# Altium PCB PCB1.PcbDoc
Units mil, origin at the board's own origin, x right, y up, seen from the top; angles counter-clockwise.
Board outline 3740 x 3020 mil, 4 copper layers (Top Layer, Mid Layer 1, Mid Layer 2, Bottom Layer), stack 61.811 mil thick; 65 components, 48 nets, 342 pads, 81 vias.
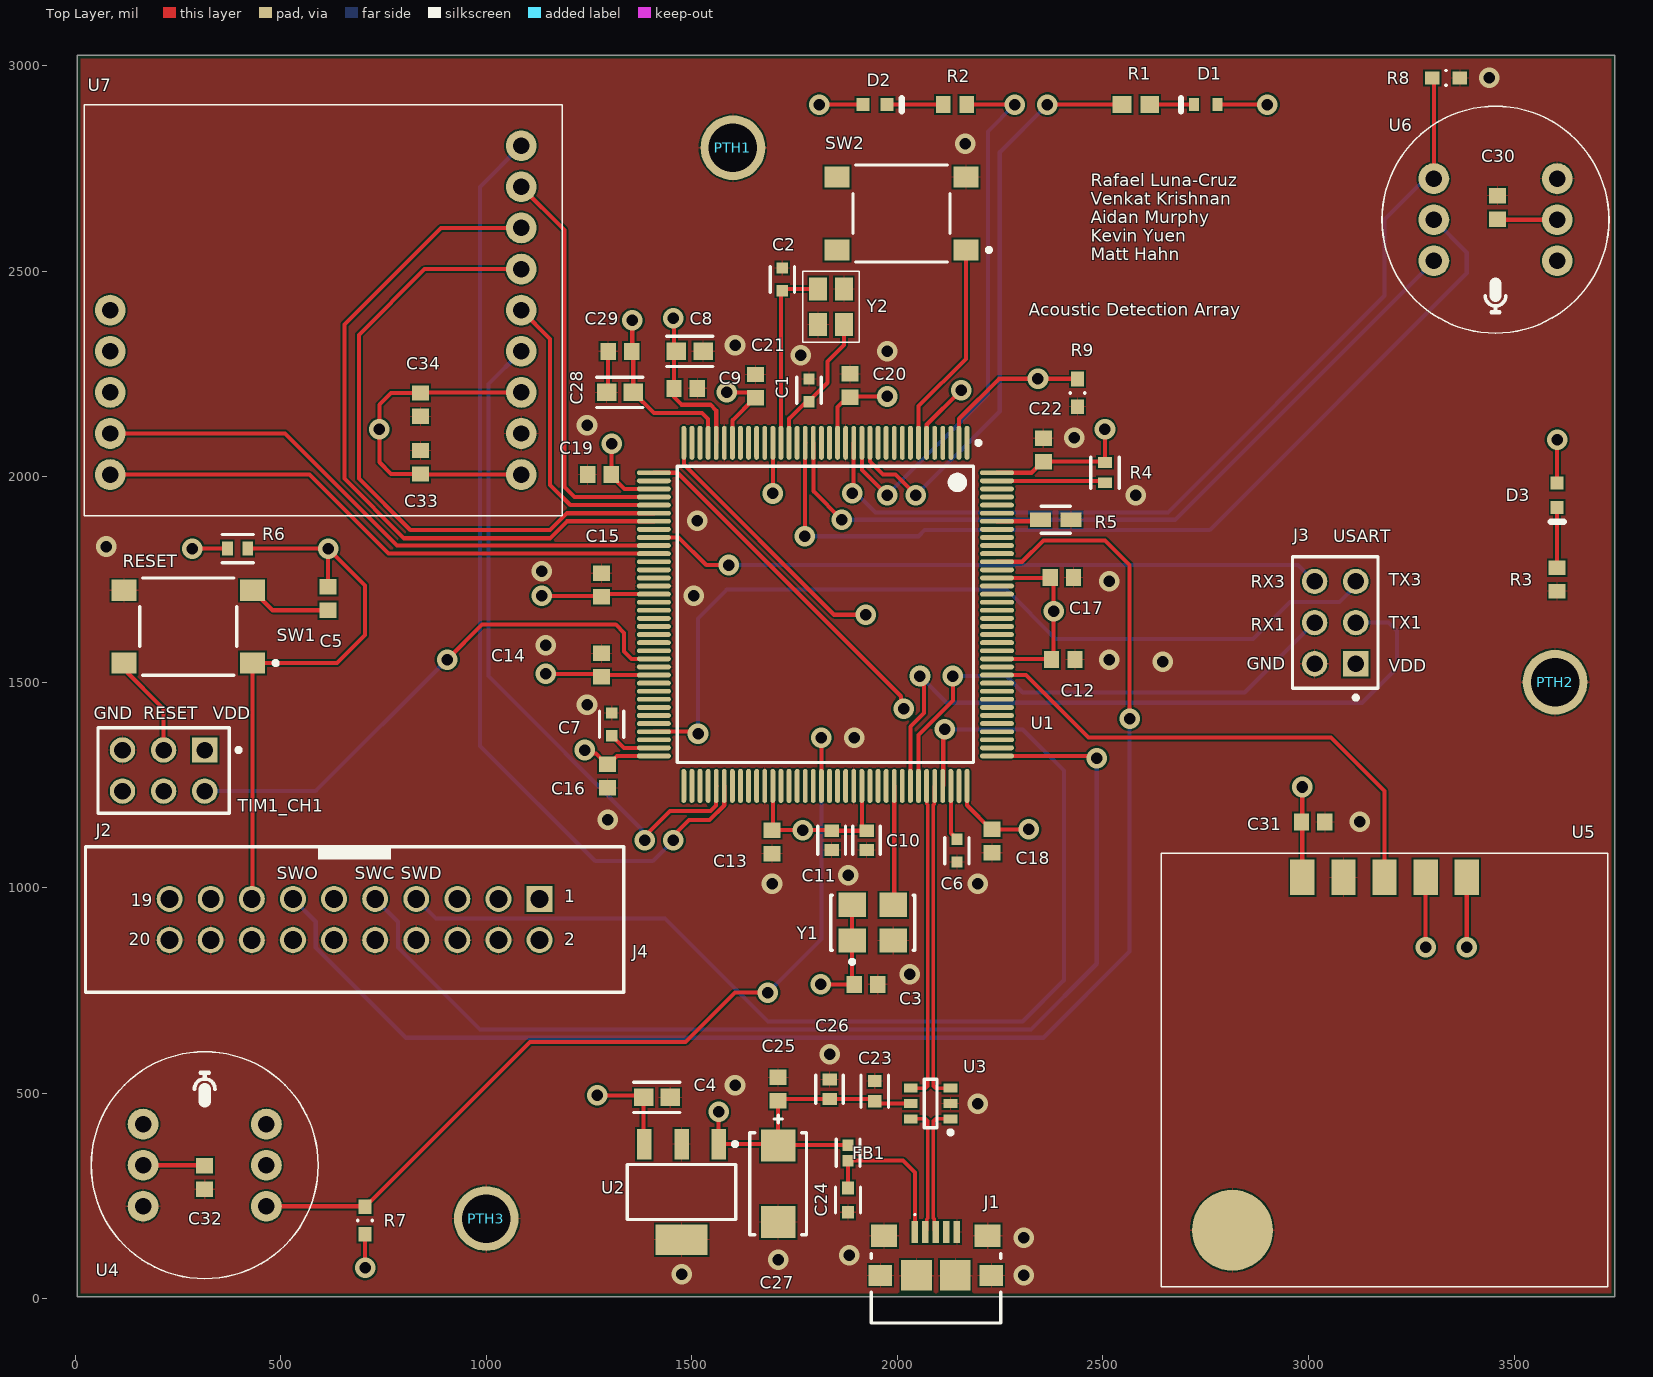
[diagram p0: Top Layer view]
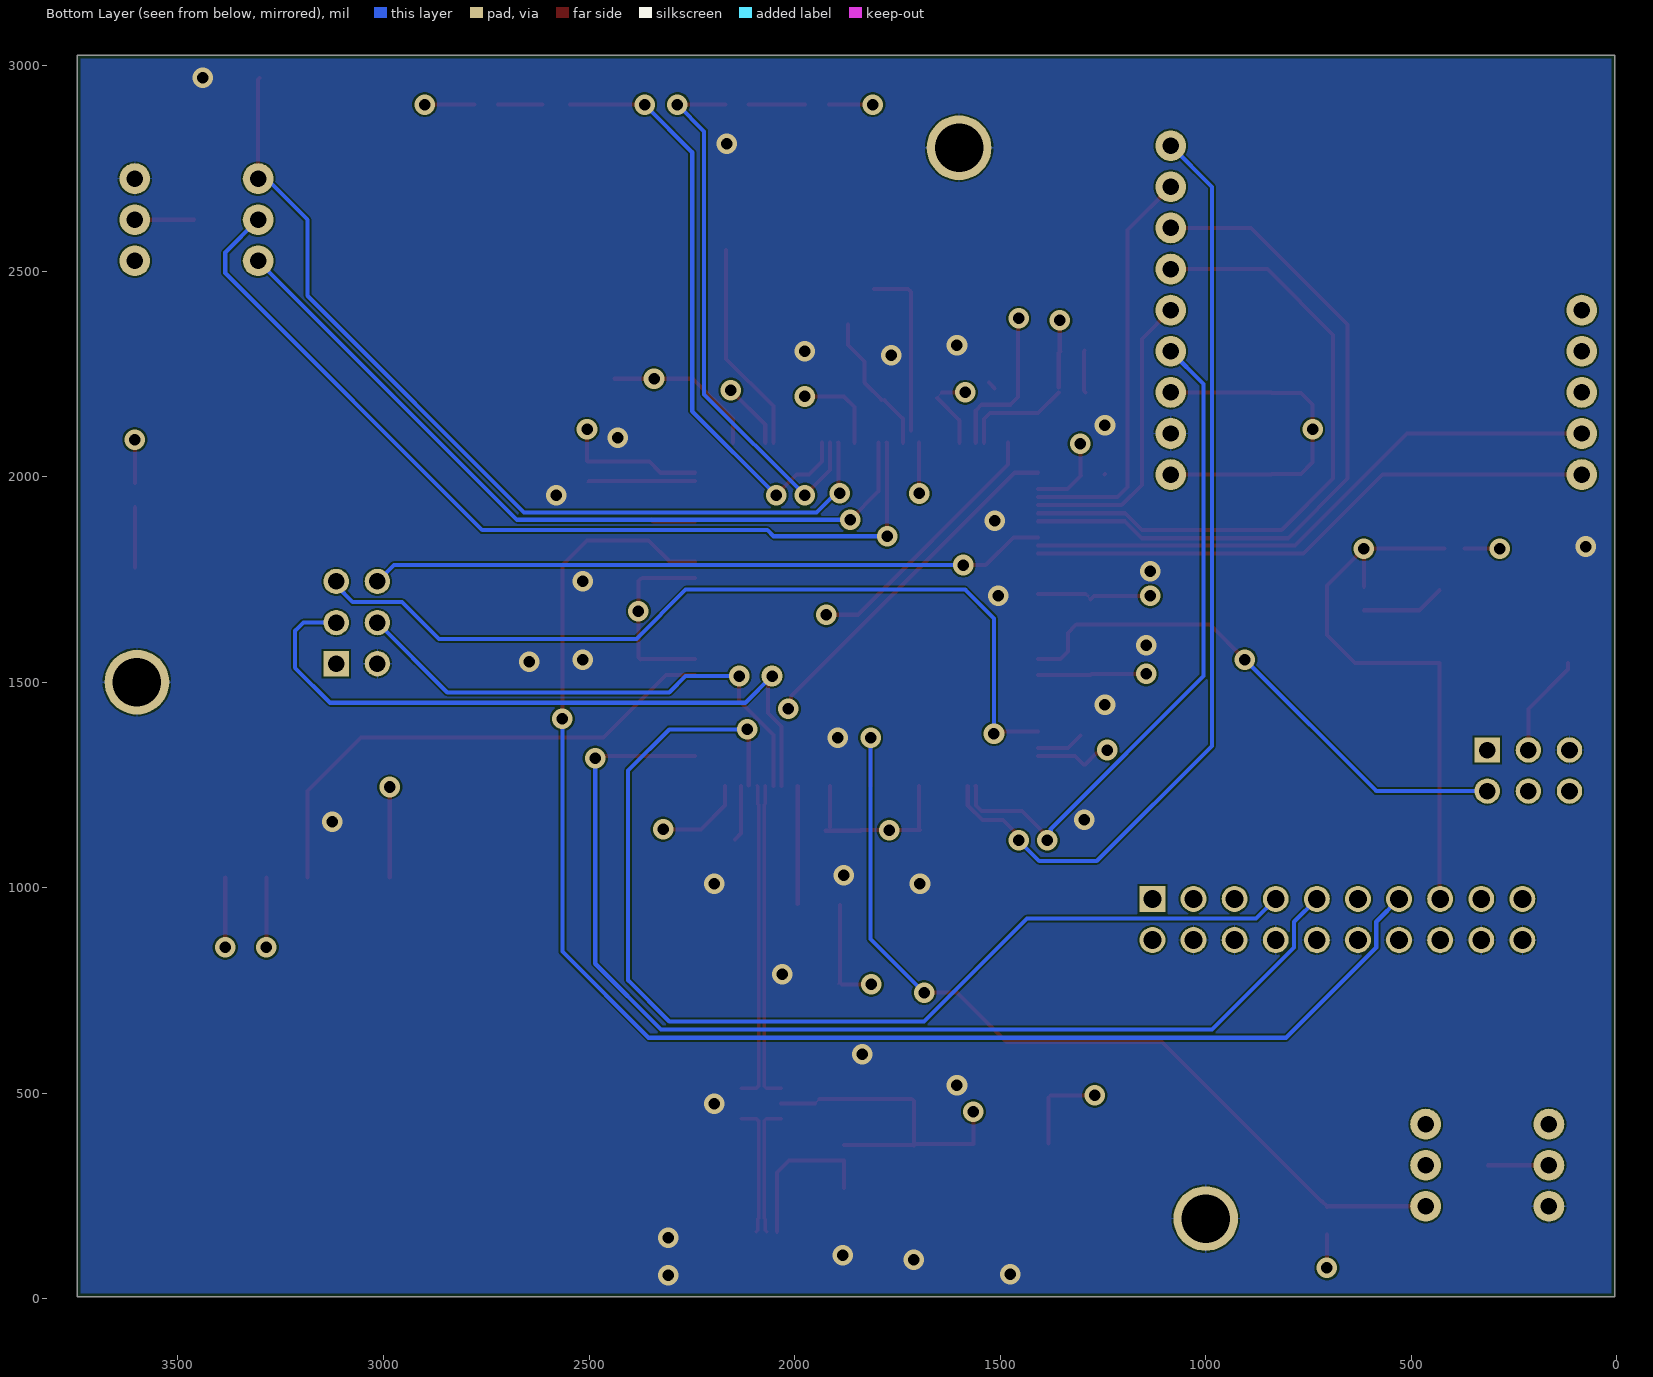
[diagram p1: Bottom Layer view, seen from below]
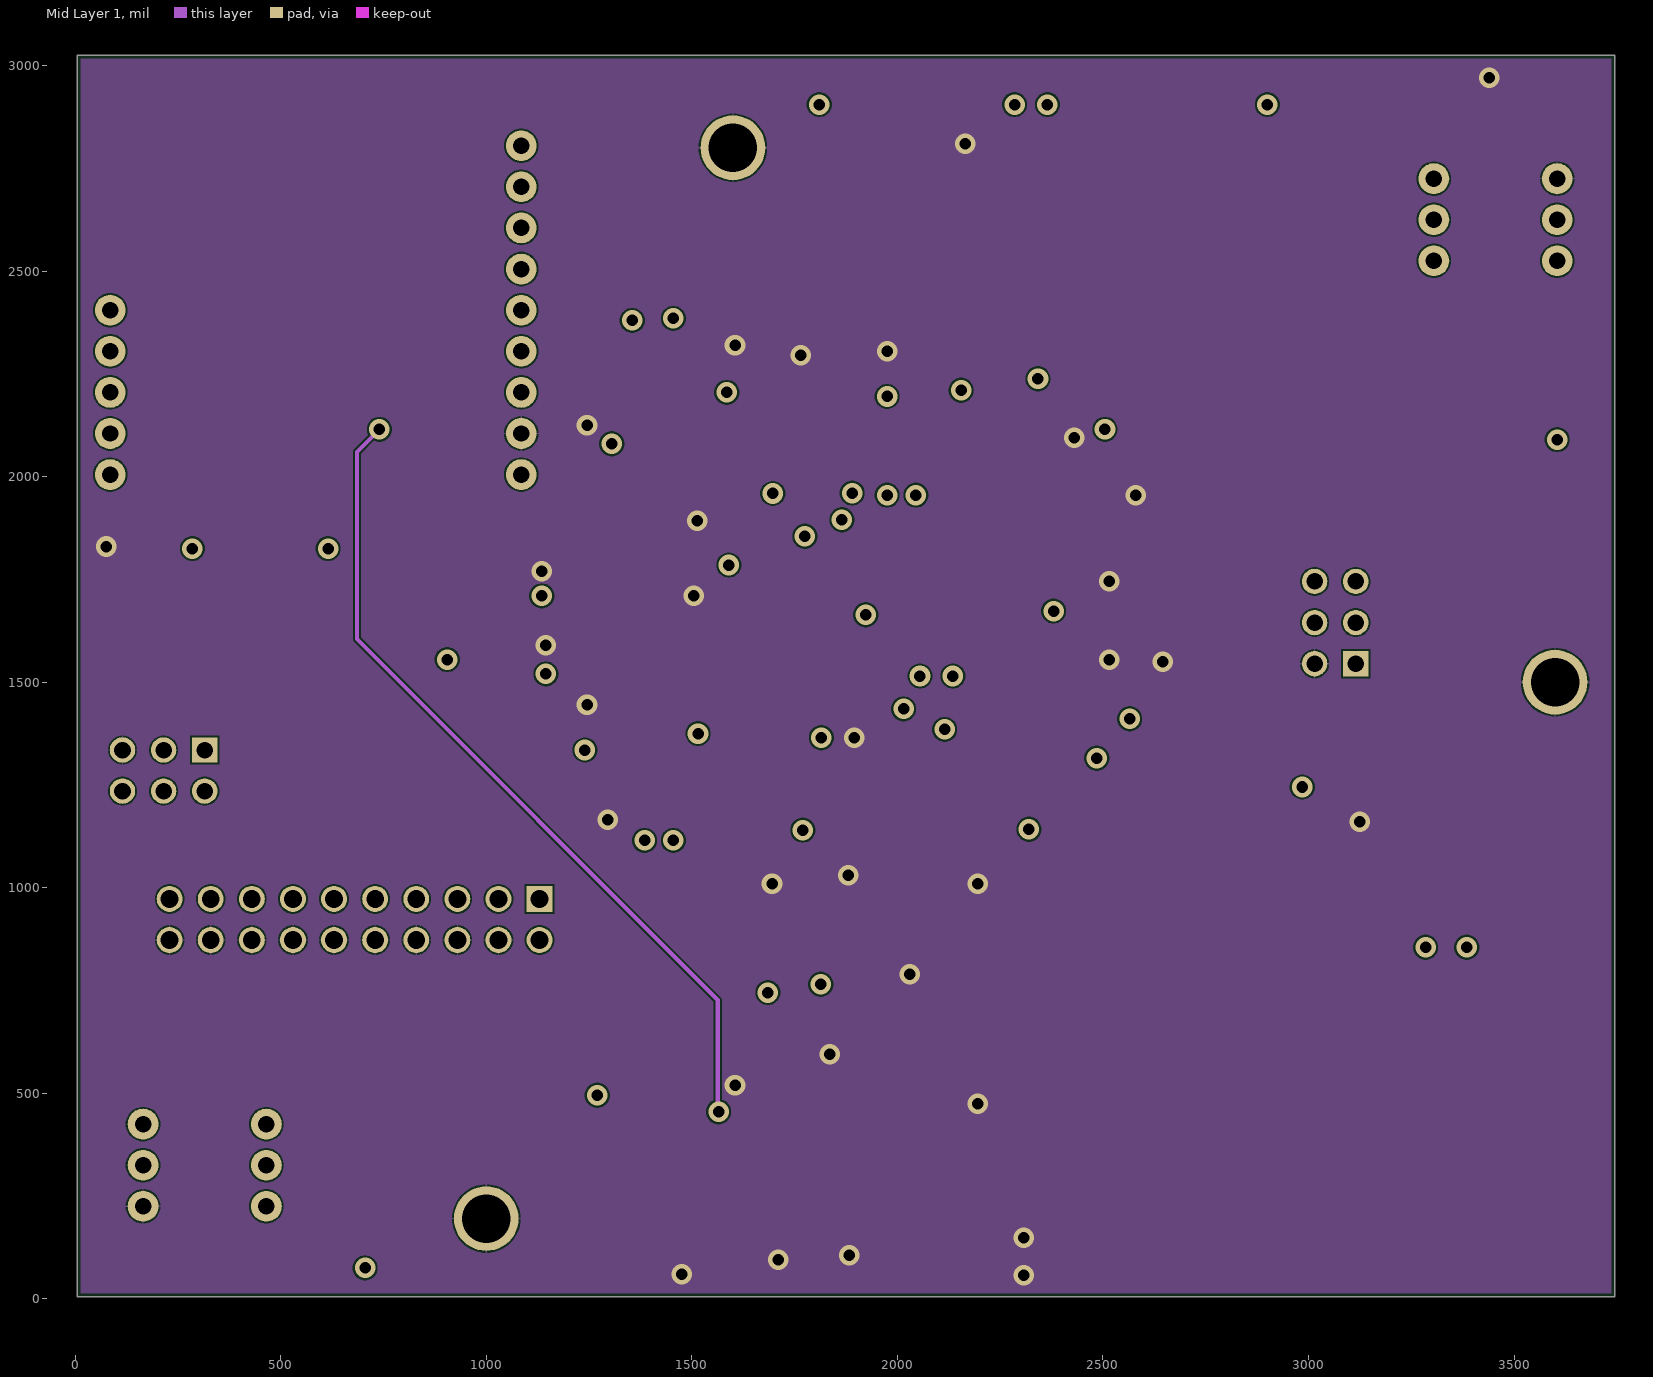
[diagram p2: Mid Layer 1]
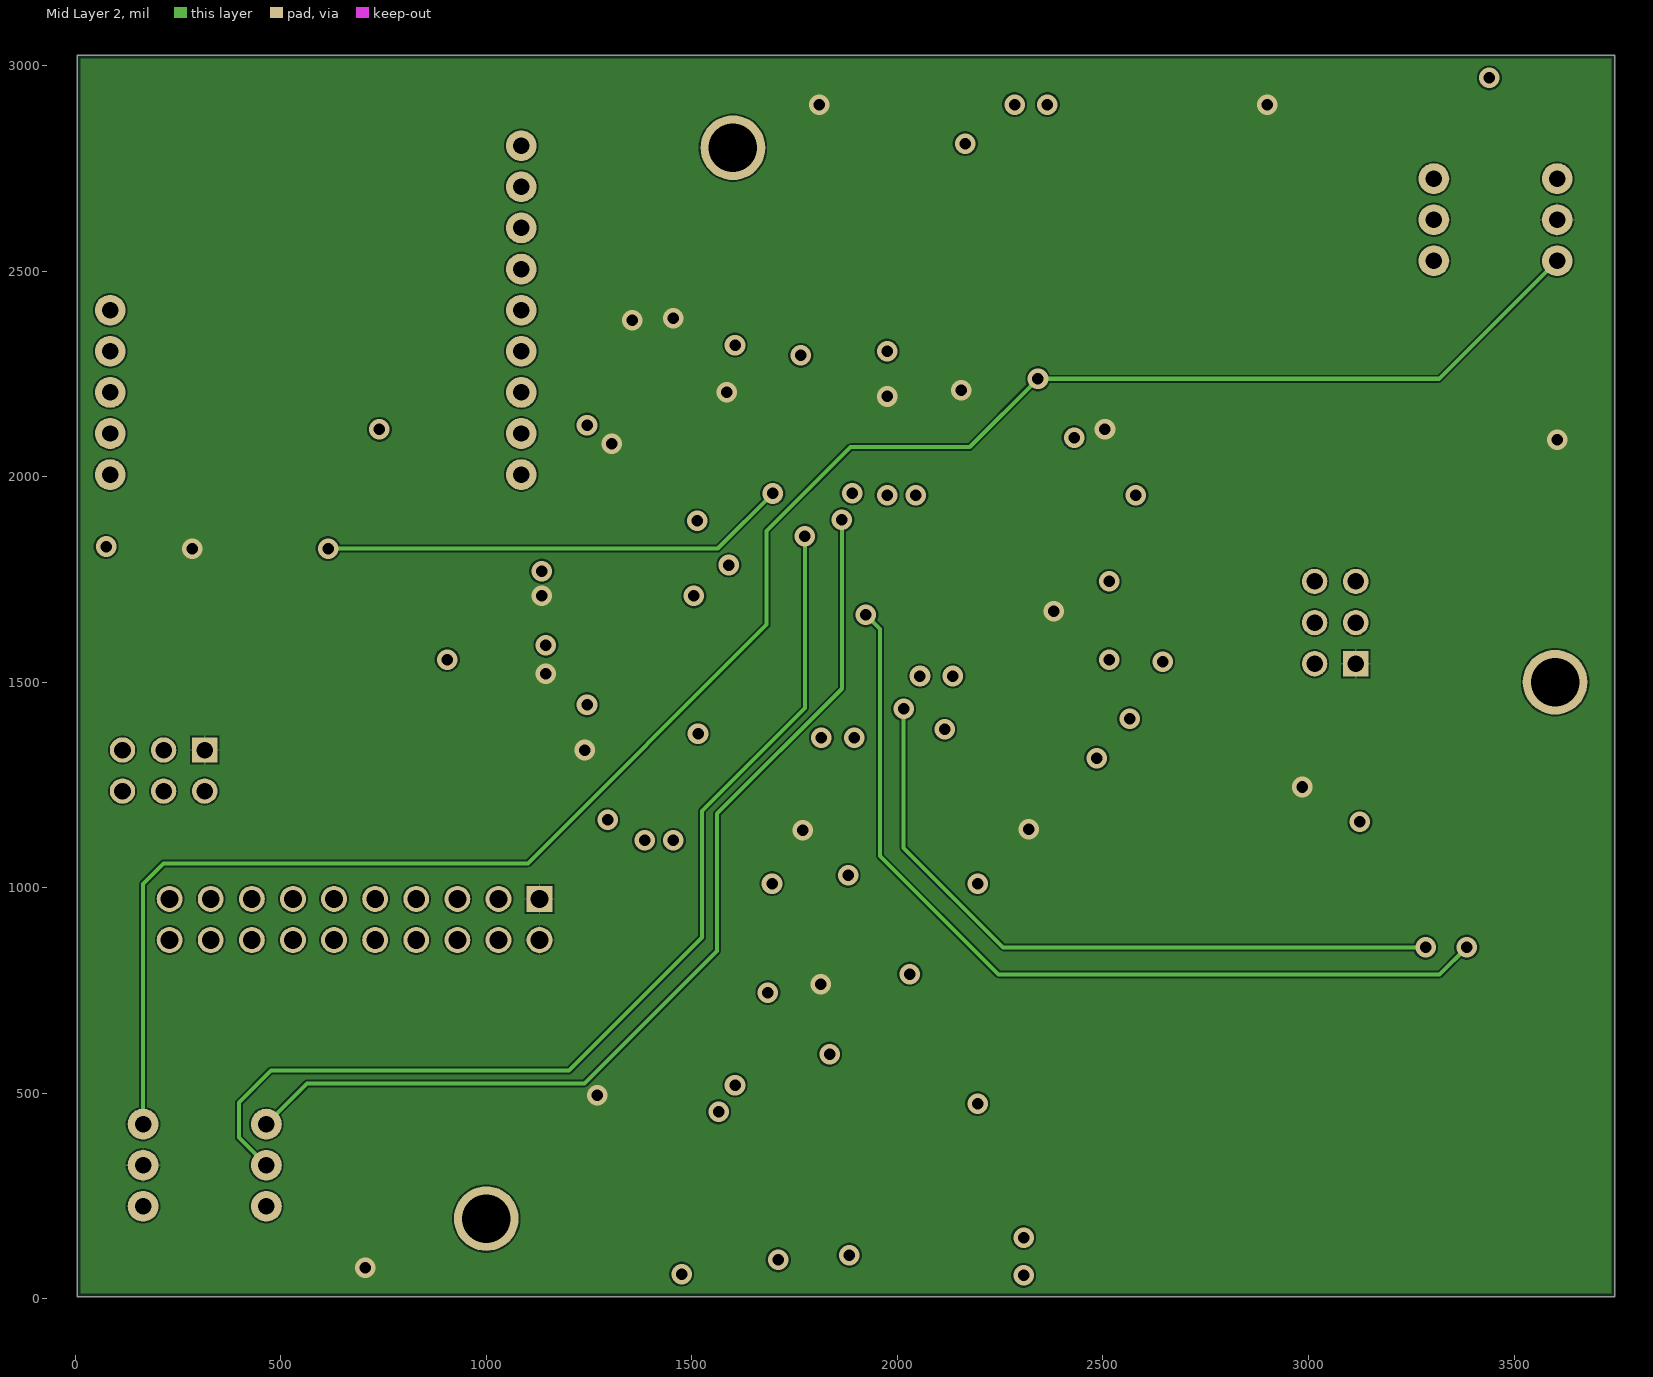
[diagram p3: Mid Layer 2]

## Layer stack, top to bottom
Top Solder: solder mask 0.5, Solder Resist, Dk 3.8
Top Layer: signal copper 1.378
Dielectric 1: prepreg 7.874, 7628, Dk 4.6
Mid Layer 1: signal copper 0.689
Core: core 41.929, FR-4, Dk 4.5
Mid Layer 2: signal copper 0.689
Dielectric 2: prepreg 7.874, 7628, Dk 4.6
Bottom Layer: signal copper 1.378
Bottom Solder: solder mask 0.5, Solder Resist, Dk 3.8

## Board outline
5,5 3745,5 3745,3025 5,3025

## Design rules (kind name [scope] priority, off if disabled: settings)
BoardOutlineClearance [All] p1: gap=7.87 ignorepadtopadclearanceinfootprint=FALSE
Clearance [All] p1: gap=4 ignorepadtopadclearanceinfootprint=FALSE except(5: Arc-Via Track-Via SMDPad-Via THPad-Via Via-Via Via-Fill Via-Poly Via-Region Via-Text; 9.84: Arc-Hole Track-Hole SMDPad-Hole THPad-Hole Via-Hole Fill-Hole Poly-Hole Region-Hole Text-Hole)
ComponentClearance [All] p1: gap=4 collisioncheckmode=3 verticalgap=4 showdistances=TRUE
DiffPairsRouting [All] p1: maxlimit=5 minlimit=5 mostfreqgap=5 toplayer_minwidth=8.69 toplayer_maxwidth=8.69 toplayer_prefwidth=8.69 midlayer1_minwidth=5.57 midlayer1_maxwidth=5.57 midlayer1_prefwidth=5.57 midlayer2_minwidth=5.57 midlayer2_maxwidth=5.57 midlayer2_prefwidth=5.57 bottomlayer_minwidth=8.69 bottomlayer_maxwidth=8.69 bottomlayer_prefwidth=8.69 impedanceprofiledriven=TRUE impedanceprofileid={BF0DEC60-58A7-4ABD-B12E-3B9B4756591A} impedanceprofilevalue=90.000000 maxuncoupledlength=500
Height [All] p1: minheight=0 maxheight=71497.94 prefheight=500
HoleSize [All] p1: absolutevalues=TRUE maxlimit=248.03 minlimit=7.87 maxpercent=80.000 minpercent=20.000
HoleToHoleClearance [All] p1: gap=9.84 allowstackedmicrovias=FALSE
MinimumAnnularRing [All] p1: minimumring=3
MinimumSolderMaskSliver [All] p1: minsoldermaskwidth=0
PlaneClearance [All] p1: clearance=4
PlaneConnect PlaneConnectPowerPads [InPadClass('PowerPads')] p1: planeconnectstyle=Direct reliefexpansion=20 reliefentries=4 reliefconductorwidth=10 reliefairgap=10
PlaneConnect [All] p2: pad.planeconnectstyle=Relief pad.reliefexpansion=11.81 pad.reliefentries=4 pad.reliefconductorwidth=4 pad.reliefairgap=4 via.planeconnectstyle=Direct via.reliefexpansion=11.81 via.reliefentries=4 via.reliefconductorwidth=5 via.reliefairgap=5
PolygonConnect PolygonConnectPowerPads [All vs (InPadClass('PowerPads'))] p1: connectstyle=Direct reliefconductorwidth=10 reliefentries=4 polygonreliefangle="90 Angle" airgapwidth=10
PolygonConnect [All] p2: thpad.connectstyle=Relief thpad.reliefconductorwidth=4 thpad.reliefentries=4 thpad.polygonreliefangle="90 Angle" thpad.airgapwidth=4 smdpad.connectstyle=Relief smdpad.reliefconductorwidth=4 smdpad.reliefentries=4 smdpad.polygonreliefangle="90 Angle" smdpad.airgapwidth=4 via.connectstyle=Direct via.reliefconductorwidth=5 via.reliefentries=4 via.polygonreliefangle="90 Angle" via.airgapwidth=5
RoutingVias [All] p1: holewidth=7.87 width=17.72 viastyle="Through Hole" minholewidth=7.87 minwidth=17.72 maxholewidth=248.03 maxwidth=257.87
SilkToSilkClearance [All] p1: silktosilkclearance=0
SilkToSolderMaskClearance [IsPad] p1: minsilkscreentomaskgap=4 clearancetoexposedcopper=TRUE
SolderMaskExpansion [All] p1: expansion=2.95 istentingtop=FALSE
Width [All] p1: maxlimit=71497.94 minlimit=4 preferedwidth=4
20 further rules are at their usual default settings.

## Classes and differential pairs
differential pair D: +D_P -D_N
differential pair D_IN: +D_IN_P -D_IN_N

## Components (designator, comment, footprint, x,y, rotation, side; value= is the part's Value field where it differs from the comment)
C1 "C1608C0G1H150J080AA" FP-C1608-080-0_1-MFG 1785,2210 r90 top
C2 "C1608C0G1H150J080AA" FP-C1608-080-0_1-MFG 1720,2480 r90 top
C3 "CL10B104KB8NNNC" SAMS-C0603-2_M 1923.54,765 r180 top
C4 "0603ZD105KAT2A" FP-0603-L_1_6_0_15-W_0_81-IPC_A 1415,490 r0 top
C5 "CL10B104KB8NNNC" SAMS-C0603-2_M 615,1703.54 r90 top
C6 "C1608X5R1V225K080AC" FP-C1608-080-0_1-MFG 2145,1090 r90 top
C7 "C1608X5R1V225K080AC" FP-C1608-080-0_1-MFG 1305,1397.56 r270 top
C8 "0603ZD105KAT2A" FP-0603-L_1_6_0_15-W_0_81-IPC_A 1495,2305 r0 top
C9 "CL10B104KB8NNNC" SAMS-C0603-2_M 1485,2215 r180 top
C10 "C0603C475K9PACTU" FP-C0603-CG-MFG 1925,1115 r270 top value=4.7uF
C11 "C0603C475K9PACTU" FP-C0603-CG-MFG 1840,1115 r270 top value=4.7uF
C12 "CL10B104KB8NNNC" SAMS-C0603-2_M 2403.54,1555 r180 top
C13 "CL10B104KB8NNNC" SAMS-C0603-2_M 1695,1111.46 r90 top
C14 "CL10B104KB8NNNC" SAMS-C0603-2_M 1280,1541.46 r270 top
C15 "CL10B104KB8NNNC" SAMS-C0603-2_M 1280,1736.46 r270 top
C16 "CL10B104KB8NNNC" SAMS-C0603-2_M 1295,1271.46 r90 top
C17 "CL10B104KB8NNNC" SAMS-C0603-2_M 2400,1755 r180 top
C18 "CL10B104KB8NNNC" SAMS-C0603-2_M 2230,1113.54 r90 top
C19 "CL10B104KB8NNNC" SAMS-C0603-2_M 1275,2005 r0 top
C20 "CL10B104KB8NNNC" SAMS-C0603-2_M 1885,2221.46 r270 top
C21 "CL10B104KB8NNNC" SAMS-C0603-2_M 1655,2220 r270 top
C22 "CL10B104KB8NNNC" SAMS-C0603-2_M 2355,2065 r270 top
C23 "GRM188R71E224KA88D" FP-GRM188-0_1-e0_2_0_5-IPC_C 1945,505 r270 top
C24 "06035C103KAT2A" FP-0603-L_1_6_0_15-W_0_81-MFG 1880,240 r270 top
C25 "CL10B104KB8NNNC" SAMS-C0603-2_M 1710,510 r270 top
C26 "C0603C475K9PACTU" FP-C0603-CG-MFG 1835,510 r90 top value=4.7uF
C27 "T491C226K010AT" FP-T491C226K010AT-MFG 1710,280 r90 top
C28 "0603ZD105KAT2A" FP-0603-L_1_6_0_15-W_0_81-IPC_A 1325,2205 r180 top
C29 "CL10B104KB8NNNC" SAMS-C0603-2_M 1325,2305 r0 top
C30 "CL10B104KB8NNNC" SAMS-C0603-2_M 3460,2655 r90 top
C31 "CL10B104KB8NNNC" SAMS-C0603-2_M 3011.46,1160 r180 top
C32 "CL10B104KB8NNNC" SAMS-C0603-2_M 315,295 r270 top
C33 "CL10B104KB8NNNC" SAMS-C0603-2_M 840,2035 r90 top
C34 "CL10B104KB8NNNC" SAMS-C0603-2_M 840,2175 r90 top
D1 "TLMY1000-GS08" VISH-TLMY1000_V 2750,2905 r180 top
D2 "HSMH-C190" AVAG-HSMX-C190_V 1945.47,2905 r0 top
D3 "HSMR-C190" AVAG-HSMX-C190_V 3605,1955 r270 top
FB1 "BLM15PX221SN1D" FP-BLM15-0_05-IPC_A 1880,355 r90 top
J1 "1981568-1" TECO-1981568-5_V 2093.7,162.4 r0 top
J2 "M20-9980346" FP-M20-9980346-MFG 215,1285 r180 top
J3 "M20-9980346" FP-M20-9980346-MFG 3065,1645 r90 top
J4 "61202021621" 61202021621 679.61,922.76 r180 top
PTH1 "Mounting Hole" "MB STAND OFF"#1 1725,2785 r0 top
PTH2 "Mounting Hole" "MB STAND OFF"#2 3600,1545 r0 top
PTH3 "Mounting Hole" "MB STAND OFF"#3 1040,195 r0 top
R1 "ERJ-3EKF5600V" RESC1608X55X30ML15T15#1 2580,2905 r180 top
R2 "ERJ-3EKF6650V" RESC1608X55X30ML15T15#2 2140,2905 r0 top
R3 "ERJ-3EKF6650V" RESC1608X55X30ML15T15#2 3605,1750 r270 top
R4 "MCT06030C1002FP500" FP-MCT0603-IPC_C 2505,2009.78 r90 top
R5 "HCJ0603ZT0R00" FP-HCJ0603-MFG 2385,1895 r0 top
R6 "MCT06030C1002FP500" FP-MCT0603-IPC_C 395,1825 r180 top
R7 "RC0603FR-07100KL" FP-RC0603-0_55-MFG 705,190 r270 top
R8 "RC0603FR-07100KL" FP-RC0603-0_55-MFG 3335,2970 r0 top
R9 "RC0603FR-07100KL" FP-RC0603-0_55-MFG 2438,2204 r270 top
SW1 "PTS645SM43SMTR92LFS" FP-PTS645SM43SMTR92LFS-MFG 275,1635 r180 top
SW2 "PTS645SM43SMTR92LFS" FP-PTS645SM43SMTR92LFS-MFG 2010,2640 r180 top
U1 "STM32F446ZET7" STM-LQFP144_M 1825,1665 r270 top
U2 "TC1108-3.3VDBTR" SOT-223-DB3_L 1475,260 r270 top
U3 "CM1231-02SO" ONSC-SOT23-6-527AJ_V 2080.91,475 r180 top
U4 "INMP441" INMP441 465,425 r180 top
U5 "GT-U7" "GT U7 GPS" 2641.69,1076.18 r0 top
U6 "INMP441" INMP441 3305,2525 r0 top
U7 "RFM95W" RFM95W 1085,2005 r90 top
Y1 "ASFL1-12.288MHZ-EC-T" FP-ASFL1-MFG 1940,915 r0 top
Y2 "2151-RH100-8.000-10-1010-EXT-TRCT-ND" 2151-RH100-8.000-10-1010-EXT-TRCT-ND 1925.12,2330.63 r90 top

## Footprints (in the part's own frame and the unit in brackets; to place one, negate y for a bottom-side part, rotate by r counter-clockwise, add the part's x,y. Pads: shape width x height; smd on the part's side, far side on the other; paste and mask are expansions set on the pad)
2151-RH100-8.000-10-1010-EXT-TRCT-ND [mm] "8 MHz Oscillator"
  rect 1.4x1.1 smd: 1(1,1.4) 2(3.2,1.4) 3(3.2,3) 4(1,3)
  silkscreen extent -0.1,0.45 4.3,3.95
61202021621 [mm] "20 pins, straight, gold plating"
  rect 1.6x1.6 hole 1.1: 1(-11.43,-1.27)
  round 1.6 hole 1.1: 2(-11.43,1.27) 3(-8.89,-1.27) 4(-8.89,1.27) 5(-6.35,-1.27) 6(-6.35,1.27) 7(-3.81,-1.27) 8(-3.81,1.27) 9(-1.27,-1.27) 10(-1.27,1.27) 11(1.27,-1.27) 12(1.27,1.27) 13(3.81,-1.27) 14(3.81,1.27) 15(6.35,-1.27) 16(6.35,1.27) 17(8.89,-1.27) 18(8.89,1.27) 19(11.43,-1.27) 20(11.43,1.27)
  silkscreen extent -16.63,-4.5 16.63,4.5, body extent -16.53,-4.42 16.53,4.75, height 9.13
AVAG-HSMX-C190_V [mm] "SMD, 2-Leads, Body 1.6x0.8mm, Height 0.9mm"
  rect 0.8x0.8 smd: 1(-0.75,0) 2(0.75,0)
  silkscreen extent 1.65,-0.4 1.65,0.4, body extent -0.8,-0.4 0.8,0.4, height 0.9
FP-0603-L_1_6_0_15-W_0_81-IPC_A [mil]
  rect 47.5x42.06 smd paste+0 mask+0: 1(-32.51,0) 2(32.51,0)
  silkscreen extent -56,-37 56,37, body extent -76,-41 76,41, height 10
FP-0603-L_1_6_0_15-W_0_81-MFG [mm]
  rect 0.8x0.75 smd paste+0 mask+0: 1(-0.75,0) 2(0.75,0)
  silkscreen extent -0.8,-0.77 0.8,0.77, body extent -1.25,-0.58 1.25,0.58, height 0.25
FP-ASFL1-MFG [mm]
  rect 1.7x1.5 smd paste+0 mask+0: 1(-1.27,-1.1) 2(1.27,-1.1) 3(1.27,1.1) 4(-1.27,1.1)
  silkscreen extent -2.6,-2.54 2.6,1.7, body extent -2.7,-1.95 2.7,1.95, height 0.25
FP-BLM15-0_05-IPC_A [mil]
  rect 28.16x26.48 smd paste+0 mask+0: 1(-18.84,0) 2(18.84,0)
  silkscreen extent -33,-29 33,29, body extent -41,-21 41,21, height 10
FP-C0603-CG-MFG [mm]
  rect 0.75x0.9 smd paste+0 mask+0: 1(-0.6,0) 2(0.6,0)
  silkscreen extent -0.87,-0.85 0.87,0.85, body extent -1.2,-0.6 1.2,0.6, height 0.25
FP-C1608-080-0_1-MFG [mm]
  rect 0.7x0.7 smd paste+0 mask+0: 1(-0.7,0) 2(0.7,0)
  silkscreen extent -0.8,-0.75 0.8,0.75, body extent -1.15,-0.55 1.15,0.55, height 0.25
FP-GRM188-0_1-e0_2_0_5-IPC_C [mil]
  rect 29.87x31.97 smd paste+0 mask+0: 1(-24.67,0) 2(24.67,0)
  silkscreen extent -40,-33 40,33, body extent -44,-22 44,22, height 10
FP-HCJ0603-MFG [mm]
  rect 1.3x0.92 smd paste+0 mask+0: 1(-0.95,0) 2(0.95,0)
  silkscreen extent -0.9,-0.83 0.9,0.83, body extent -1.7,-0.63 1.7,0.63, height 0.25
FP-M20-9980346-MFG [mm]
  rect 1.57x1.57 hole 1.02 paste-1000 mask+0: 1(-2.54,-1.27)
  round 1.57 hole 1.02 paste-1000 mask+0: 2(-2.54,1.27) 3(0,-1.27) 4(0,1.27) 5(2.54,-1.27) 6(2.54,1.27)
  silkscreen extent -4.76,-2.64 4.06,2.64, body extent -4.16,-2.74 4.16,2.74, height 0.25
FP-MCT0603-IPC_C [mil]
  rect 26.13x33.94 smd paste+0 mask+0: 1(-24.78,0) 2(24.78,0)
  silkscreen extent -38,-34 38,34, body extent -42,-23 42,23, height 10
FP-PTS645SM43SMTR92LFS-MFG [mm]
  rect 1.55x1.3 smd paste+0 mask+0: 1(-3.975,2.25) 2(3.975,2.25) 3(-3.975,-2.25) 4(3.975,-2.25)
  silkscreen extent -5.53,-3 3,3, body extent -4.85,-3.1 4.85,3.1, height 0.25
FP-RC0603-0_55-MFG [mm]
  rect 0.9x0.8 smd paste+0 mask+0: 1(-0.85,0) 2(0.85,0)
  silkscreen extent -0.03,-0.45 0.03,0.45, body extent -1.4,-0.55 1.4,0.55, height 0.25
FP-T491C226K010AT-MFG [mm]
  rect 1.99x2.13 smd paste+0 mask+0: 1(-2.36,0) 2(2.36,0)
  silkscreen extent -3.15,-1.75 4.25,1.75, body extent -3.48,-1.87 3.48,1.87, height 0.25
"GT U7 GPS" [mm] "GT U7 GPS Footprint"
  rect 1.5x2.2 smd: 1(8.72,-1.3) 2(11.26,-1.3) 3(13.8,-1.3) 4(16.34,-1.3) 5(18.88,-1.3)
  round 5 smd: 6(4.4,-23.1)
  silkscreen extent 0,-26.6 27.6,0.2
INMP441 [mil] "Footprint for INMP441 Microphone"
  round 75 hole 40: 1(0,200) 2(0,100) 3(0,0) 4(300,200) 5(300,100) 6(300,0)
  silkscreen extent -126,-176 426,376
"MB STAND OFF"#1 [mm]
  round 4 hole 3: 1(-3.175,0.381)
"MB STAND OFF"#2 [mm]
  round 4 hole 3: 1(0,-1.143)
"MB STAND OFF"#3 [mm]
  round 4 hole 3: 1(-1.016,0)
ONSC-SOT23-6-527AJ_V [mm] "SOT23, 6-Leads, Body 3x1.8mm, Pitch 0.95mm"
  rect 0.85x0.56 smd: 1(-1.225,0.95) 2(-1.225,0) 3(-1.225,-0.95) 4(1.225,-0.95) 5(1.225,0) 6(1.225,0.95)
  silkscreen extent -1.35,-1.5 0.4,1.9, body extent -0.9,-1.5 0.9,1.5, height 1.45
RESC1608X55X30ML15T15#1 [mm] "Chip Resistor, 2-Leads, Body 1.75x0.95mm, IPC Low Density"
  rect 1.15x1.05 smd: 1(-0.85,0) 2(0.85,0)
  body extent -0.87,-0.48 0.87,0.48, height 0.55
RESC1608X55X30ML15T15#2 [mm] "Chip Resistor, 2-Leads, Body 1.60x0.80mm, IPC Low Density"
  rect 0.9x1.05 smd: 1(-0.725,0) 2(0.725,0)
  body extent -0.87,-0.48 0.87,0.48, height 0.55
RFM95W [mil] "LoRa"
  round 75 hole 40: 1(0,0) 2(100,0) 3(200,0) 4(300,0) 5(400,0) 6(500,0) 7(600,0) 8(700,0) 9(800,0) 10(0,1000) 11(100,1000) 12(200,1000) 13(300,1000) 14(400,1000)
  silkscreen extent -100,-100 900,1063
SAMS-C0603-2_M [mm] "Chip Capacitor, 2-Leads, Body 1.70x0.90mm, IPC Low Density"
  rect 0.95x1.05 smd: 1(-0.725,0) 2(0.725,0)
  body extent -0.85,-0.45 0.85,0.45, height 0.9
SOT-223-DB3_L [mm] "SOT223, 4-Leads, Body 6.5x3.5mm, Pitch 2.3mm, Lead Span 7mm, IPC High Density"
  rect 1.9x0.9 smd: 1(-2.95,2.3) 2(-2.95,0) 3(-2.95,-2.3)
  rect 1.9x3.2 smd: 4(2.95,0)
  silkscreen extent -3.07,-3.35 1.7,3.43, body extent -1.85,-3.35 1.85,3.35, height 1.8
STM-LQFP144_M [mm] "Thin QFP, 144-Leads, Body 20x20mm, Pitch 0.5mm, IPC Low Density"
  oval 2.1x0.3 smd: 1(-10.6,8.75) 2(-10.6,8.25) 3(-10.6,7.75) 4(-10.6,7.25) 5(-10.6,6.75) 6(-10.6,6.25) 7(-10.6,5.75) 8(-10.6,5.25) 9(-10.6,4.75) 10(-10.6,4.25) 11(-10.6,3.75) 12(-10.6,3.25) 13(-10.6,2.75) 14(-10.6,2.25) 15(-10.6,1.75) 16(-10.6,1.25) 17(-10.6,0.75) 18(-10.6,0.25) 19(-10.6,-0.25) 20(-10.6,-0.75) 21(-10.6,-1.25) 22(-10.6,-1.75) 23(-10.6,-2.25) 24(-10.6,-2.75) 25(-10.6,-3.25) 26(-10.6,-3.75) 27(-10.6,-4.25) 28(-10.6,-4.75) 29(-10.6,-5.25) 30(-10.6,-5.75) 31(-10.6,-6.25) 32(-10.6,-6.75) 33(-10.6,-7.25) 34(-10.6,-7.75) 35(-10.6,-8.25) 36(-10.6,-8.75) 73(10.6,-8.75) 74(10.6,-8.25) 75(10.6,-7.75) 76(10.6,-7.25) 77(10.6,-6.75) 78(10.6,-6.25) 79(10.6,-5.75) 80(10.6,-5.25) 81(10.6,-4.75) 82(10.6,-4.25) 83(10.6,-3.75) 84(10.6,-3.25) 85(10.6,-2.75) 86(10.6,-2.25) 87(10.6,-1.75) 88(10.6,-1.25) 89(10.6,-0.75) 90(10.6,-0.25) 91(10.6,0.25) 92(10.6,0.75) 93(10.6,1.25) 94(10.6,1.75) 95(10.6,2.25) 96(10.6,2.75) 97(10.6,3.25) 98(10.6,3.75) 99(10.6,4.25) 100(10.6,4.75) 101(10.6,5.25) 102(10.6,5.75) 103(10.6,6.25) 104(10.6,6.75) 105(10.6,7.25) 106(10.6,7.75) 107(10.6,8.25) 108(10.6,8.75)
  oval 0.3x2.1 smd: 37(-8.75,-10.6) 38(-8.25,-10.6) 39(-7.75,-10.6) 40(-7.25,-10.6) 41(-6.75,-10.6) 42(-6.25,-10.6) 43(-5.75,-10.6) 44(-5.25,-10.6) 45(-4.75,-10.6) 46(-4.25,-10.6) 47(-3.75,-10.6) 48(-3.25,-10.6) 49(-2.75,-10.6) 50(-2.25,-10.6) 51(-1.75,-10.6) 52(-1.25,-10.6) 53(-0.75,-10.6) 54(-0.25,-10.6) 55(0.25,-10.6) 56(0.75,-10.6) 57(1.25,-10.6) 58(1.75,-10.6) 59(2.25,-10.6) 60(2.75,-10.6) 61(3.25,-10.6) 62(3.75,-10.6) 63(4.25,-10.6) 64(4.75,-10.6) 65(5.25,-10.6) 66(5.75,-10.6) 67(6.25,-10.6) 68(6.75,-10.6) 69(7.25,-10.6) 70(7.75,-10.6) 71(8.25,-10.6) 72(8.75,-10.6) 109(8.75,10.6) 110(8.25,10.6) 111(7.75,10.6) 112(7.25,10.6) 113(6.75,10.6) 114(6.25,10.6) 115(5.75,10.6) 116(5.25,10.6) 117(4.75,10.6) 118(4.25,10.6) 119(3.75,10.6) 120(3.25,10.6) 121(2.75,10.6) 122(2.25,10.6) 123(1.75,10.6) 124(1.25,10.6) 125(0.75,10.6) 126(0.25,10.6) 127(-0.25,10.6) 128(-0.75,10.6) 129(-1.25,10.6) 130(-1.75,10.6) 131(-2.25,10.6) 132(-2.75,10.6) 133(-3.25,10.6) 134(-3.75,10.6) 135(-4.25,10.6) 136(-4.75,10.6) 137(-5.25,10.6) 138(-5.75,10.6) 139(-6.25,10.6) 140(-6.75,10.6) 141(-7.25,10.6) 142(-7.75,10.6) 143(-8.25,10.6) 144(-8.75,10.6)
  silkscreen extent -10.72,-9.15 9.15,9.58, body extent -10,-10 10,10, height 1.6
TECO-1981568-5_V [mm] "SMD, 5-Leads, Body 8x5.9mm, Pitch 0.65mm"
  rect 0.4x1.35 smd: 1(-1.3,0) 2(-0.65,0) 3(0,0) 4(0.65,0) 5(1.3,0)
  rect 1.6x1.4 smd: 6(-3.2,-0.225) 7(3.2,-0.225)
  rect 1.45x1.3 smd: 8(-3.425,-2.675) 9(3.425,-2.675)
  rect 1.9x1.9 smd: 10(-1.2,-2.675) 11(1.2,-2.675)
  silkscreen extent -4,-5.63 4,1.12, body extent -4,-5.63 4,0.28, height 3
VISH-TLMY1000_V [mm] "SMD, 2-Leads, Body 1.6x0.8mm"
  rect 0.6x0.8 smd: 1(-0.725,0) 2(0.725,0)
  silkscreen extent 1.53,-0.4 1.53,0.4, body extent -0.8,-0.4 0.8,0.4, height 0.65

## Part data
C1 C2: library part CMP-08246-005526-1, "Multilayer Ceramic Capacitors 15pF ±5% 50V C0G SMD 0603", Capacitance=15pF, Case Code (Imperial)=0603, Case Code (Metric)=1608, Dielectric=C0G, Dielectric Material=Ceramic, Max Operating Temperature=125°C, Min Operating Temperature=-55°C, Package Quantity=1, Temperature Coefficient=30ppm/°C, Tolerance=5%, Voltage=50V, Case/Package=0603, Construction=Flat, Depth=0.8mm, Height=0.8mm, Lead Free="Lead Free", Length=1.6mm, Mount="Surface Mount", Number of Pins=2, Packaging="Tape and Reel", Radiation Hardening=No, REACH SVHC="No SVHC", RoHS Compliant=Yes, Series=C, Termination=SMD/SMT, Thickness=0.037inch, Voltage Rating=50V, Voltage Rating (DC)=50V, Weight=7.1E-05oz, Width=0.031inch
C3 C5 C9 C12 C13 C14 C15 C16 C17 C18 C19 C20 C21 C22 C25 C29 C30 C31 C32 C33 C34: library part CMP-2000-05332-1, "Multi-layer Ceramic Capacitor, -55 to 125 degC, 2-Pin SMD (0603), RoHS, Tape and Reel", Capacitance=0.1µF, Case Size/Dimension=0603, Dielectric=X7R, Manufacturer="Samsung Electro-Mechanics", Rated Voltage=50V, Tolerance (%)=±10%, Datasheet URL=https://datasheet.ciiva.com/29198/456651-da-01-en-vs-kondensator-0605-29198839.pdf, Datasheet Version=Nov-10, Manufacturer URL=http://www.samsungsem.com/global/index.jsp
C4 C8 C28: library part CMP-2006-04559-3, "General Purpose Ceramic Capacitor, 0603, 1uF, 10%, X5R, 15%, 10V", Capacitance=1uF, Case Code (Imperial)=0603, Case Code (Metric)=1608, Dielectric=X5R, Insulation Resistance=100GR, Max Operating Temperature=85°C, Min Operating Temperature=-55°C, Package Quantity=4000, Tolerance=10%, Voltage=10V, Case/Package=0603, Construction=Flat, Contact Plating=Tin, Depth=0.81mm, Dissipation Factor=5%, Height=0.9mm, Lead Free="Lead Free", Length=1.6mm, Mount="Surface Mount", Number of Pins=2, Packaging="Tape and Reel", Radiation Hardening=No, REACH SVHC="No SVHC", RoHS Compliant=Yes, Series=-, Termination=SMD/SMT, Thickness=0.035inch, Voltage Rating=10V, Voltage Rating (DC)=10V, Width=0.81mm
C6 C7: library part CMP-08246-004960-1, "Multilayer Ceramic Capacitors 2.2μF ±10% 35V X5R SMD 0603", Capacitance=2.2uF, Case Code (Imperial)=0603, Case Code (Metric)=1608, Dielectric=X5R, Dielectric Material=Ceramic, Max Operating Temperature=85°C, Min Operating Temperature=-55°C, Package Quantity=1, Tolerance=10%, Voltage=35V, Case/Package=0603, Construction=Flat, Depth=0.8mm, Height=0.8mm, Lead Free="Lead Free", Length=1.6mm, Mount="Surface Mount", Packaging="Tape and Reel", Radiation Hardening=No, REACH SVHC="No SVHC", Resistor Type=Ceramic, RoHS Compliant=Yes, Series=C, Termination=SMD/SMT, Thickness=800um, Voltage Rating=35V, Voltage Rating (DC)=35V, Weight=7.1E-05oz, Width=0.031inch
C10 C11 C26: library part CMP-2006-02256-2, "CAP CER 4.7UF 6.3V X5R 0603", Capacitance=4.7uF, Manufacturer=Kemet, Package=C0603-CG, Temperature="-55°C to +85°C", Temperature Characteristic=X5R, Temperature Coefficient=15%, Temperature Range High=+85°C, Temperature Range Low=-55°C, Tolerance=10%, Voltage Rating=6.3V, Automotive=No, Category=Cap, ComponentLink2Description=Datasheet, ComponentLink2URL=https://content.kemet.com/datasheets/KEM_C1006_X5R_SMD.pdf, Device Class L1="Passive Components", Device Class L2=Capacitors, Device Class L3="Ceramic Capacitors", Digikey Description="CAP CER 4.7UF 6.3V X5R 0603", Height=0.9mm, Ipc Land Pattern Name=CAPC16080X80, Lead Free=Yes, Manufacturer Part Number=C0603C475K9PACTU, Material=Ceramic, Mouser Description="Multilayer Ceramic Capacitors MLCC - SMD/SMT 6.3volts 4.7uF X5R 10%", Octopart=https://octopart.com/c0603c475k9pactu-kemet-104242, RoHS=TRUE
C23: library part CMP-1035-02648-3, "Chip Multilayer Ceramic Capacitors for General Purpose, 0603, 0.22uF, X7R, 15%, 10%, 25V", Capacitance=220nF, Case Code (Imperial)=0603, Case Code (Metric)=1608, Dielectric=X7R, Max Operating Temperature=125°C, Min Operating Temperature=-55°C, Package Quantity=1, Tolerance=10%, Voltage=50V, Voltage Rating=25V, Case/Package=0603, Depth=0.8mm, Height=0.8mm, Lead Free="Lead Free", Length=1.6mm, Material=Ceramic, Mount="Surface Mount", Number of Pins=2, Packaging="Tape and Reel", Radiation Hardening=No, REACH SVHC="No SVHC", Termination=SMD/SMT, Thickness=0.035inch, Voltage Rating (DC)=25V, Width=0.8mm
C24: library part CMP-2006-04374-2, "General Purpose Ceramic Capacitor, 0603, 10nF, 10%, X7R, 15%, 50V", Capacitance=10nF, Case Code (Imperial)=0603, Case Code (Metric)=1608, Dielectric=X7R, Dielectric Material=Ceramic, Insulation Resistance=100GR, Max Operating Temperature=125°C, Min Operating Temperature=-55°C, Package Quantity=1, Tolerance=10%, Voltage=50V, Case/Package=0603, Contact Plating=Tin, Depth=0.81mm, Dissipation Factor=2.5%, Height=0.9mm, Lead Free="Lead Free", Length=1.6mm, Mount="Surface Mount", Number of Pins=2, Packaging="Tape and Reel", Radiation Hardening=No, REACH SVHC="No SVHC", Termination=SMD/SMT, Thickness=0.035inch, Voltage Rating=50V, Voltage Rating (DC)=50V, Width=0.032inch
C27: library part CMP-03017-000041-1, "CAP TANT 22UF 10% 10V 2312", Capacitance=22uF, Case Code (Imperial)=2312, Case Code (Metric)=6032, Case/Package=Molded, Dielectric Material=Tantalum, ESR (Equivalent Series Resistance)=1.8R, Leakage Current=2.2uA, Max Operating Temperature=125°C, Min Operating Temperature=-55°C, Package Quantity=1, Tolerance=20%, Voltage=10V, Construction=Flat, Depth=3.2mm, Dissipation Factor=6%, Features="General Purpose", Height=2.5mm, Height - Seated (Max)=0.11inch, Lead Free="Lead Free", Length=6mm, Life (Hours)=2000Hour, Mount="Surface Mount", Number of Pins=2, Packaging="Tape and Reel", Polarity=Polar, Radiation Hardening=No, REACH SVHC="No SVHC", RoHS Compliant=Yes, Series=T491, Size=2.5mm, Termination=SMD/SMT, Voltage Rating=10V, Voltage Rating (DC)=10V, Width=3.2mm
D1: library part CMP-2000-07255-1, "Low Current LED, 40 mW, -40 to 100 degC, 2-Pin SMD, RoHS, Tape and Reel", Forward Current If=2mA, Forward Voltage=1.8V, LED Colour=Yellow, Manufacturer=Vishay, Package Description="2-Pin Surface Mount Device, Body 1.6 x 0.8 mm", Package Reference=TLMY1000, Automotive Qualification Standard=AEC-Q100, Bulb Size=1.6mmx0.8mm, Datasheet URL=http://www.vishay.com/docs/83172/tlmo1000.pdf, Datasheet Version="Rev. 2.0, 09/2013", LED Mounting=SMD, Lens Shape=Rectangular, Luminous Intensity=7.5mcd, Manufacturer URL=http://www.vishay.com/, Mounting Technology=SurfaceMount, MSL=MSL2-1year, Packaging=CutTape, Product Range=-, SVHC=ToBeAdvised, Viewing Angle=80°, Wavelength Typ=595nm
D2: library part CMP-1744-00004-1, "LED Uni-Color Red, 65 mW, 20 mA, -40 to 85 degC, 2-Pin SMD, RoHS, Tape and Reel", Current Rating="1 A", Max Operating Temperature="85 degC", Min Operating Temperature="-30 degC", Package Quantity=2000, ComponentLink1Description="Manufacturer URL", ComponentLink1URL=http://www.avagotech.com/, ComponentLink2Description=Datasheet, ComponentLink2URL=http://docs.avagotech.com/docs/AV02-0551EN, ComponentLink3Description="Package Specification", ComponentLink3URL=http://www.fairchildsemi.com/dwg/MA/MA03D.pdf, Connector Type=USB, Contact Material=Copper, Contact Plating=Gold, DatasheetVersion=Mar-12, Gender=Male, Height="2.8 mm", Lead Pitch="0.65 mm", Length="7.5 mm", Mount="Surface Mount", PackageDescription="2-Pin Surface Mount Device, Body 1.6 x 0.8 mm, Height 0.9 mm", PackageReference=HSMX-C190, Packaging="Tape and Reel", Pins=5, REACH SVHC="No SVHC", RoHSCompliant=true, Width="5.6 mm"
D3: library part CMP-1744-00007-1, "LED Uni-Color Blue, 78 mW, 20 mA, -40 to 85 degC, 2-Pin SMD, RoHS, Tape and Reel", Case\Package=TO-236-3, Input Capacitance="73 pF", Max Operating Temperature="150 degC", Max Power Dissipation="360 mW", Min Operating Temperature="-55 degC", Nominal Dual Supply Voltage="-50 V", Package Quantity=3000, ComponentLink1Description="Manufacturer URL", ComponentLink1URL=http://www.avagotech.com/, ComponentLink2Description=Datasheet, ComponentLink2URL=http://docs.avagotech.com/docs/AV02-0977EN, ComponentLink3Description="Package Specification", ComponentLink3URL=http://www.fairchildsemi.com/dwg/MA/MA03D.pdf, DatasheetVersion=Apr-10, Elements=1, Height="0.93 mm", Length="2.92 mm", Mount="Surface Mount", Nominal Vgs="-1.7 V", PackageDescription="2-Pin Surface Mount Device, Body 1.6 x 0.8 mm, Height 0.9 mm", PackageReference=HSMX-C190, Packaging="Tape and Reel", Pins=3, Radiation Hardening=No, Rds On Max="10 Ohm", REACH SVHC="No SVHC", RoHSCompliant=true, Typical Rise Time="6.3 ns", Width="1.3 mm"
FB1: library part CMP-0686-00269-4, "Chip Ferrite Bead, 0402, 220Ω @ 100MHz, 0.1Ω, 25%, 1.4A", Case Code (Imperial)=0402, Case Code (Metric)=1005, Current Rating=1.4A, DC Resistance (DCR)=100mR, Max Operating Temperature=125°C, Min Operating Temperature=-55°C, Package Quantity=1, Test Frequency=100MHz, Tolerance=25%, Case/Package=0402, Height=0.5mm, Impedance=220R, Lead Free="Lead Free", Length=1mm, Material=Steel, Max Current Rating=1.4A, Max DC Current=1.4A, Number of Circuits=1, Number of Lines=1, Number of Pins=2, Packaging="Tape and Reel", RoHS Compliant=Yes, Series=BLM15PX, Termination=SMD/SMT, Width=0.5mm
J1: library part CMP-2000-05408-1, "Micro USB Receptacle Standard Type B Assy, 5-Pin SMD, RoHS, Tape and Reel", Current Rating (Max)=1/ContactA, Manufacturer="TE Connectivity", Operating Temp Range=-55Cto85C, Operating Temperature Max Deg. C=85C, Operating Temperature Min Deg. C=-55C, Voltage Rating Max=30VAC, Body Orientation=RightAngle, Contact Material=CopperAlloy, Contact Plating=GoldOverNickel, Datasheet URL=http://www.mouser.com/ds/2/418/NG_CD_1981568_E2-621296.pdf, Datasheet Version="Rev. E2, 08/2015", Gender=RCP, Housing Material=Thermoplastic, Manufacturer URL=http://www.te.com/, Mounting Style=SurfaceMount, Number of Contacts=5POS, Number of Ports=1Port, Number of Terminals=5, Packaging=TapeandReel, Pitch (mm)=0.65mm, Product Depth (mm)=5.6mm, Product Height (mm)=3mm, Product Length (mm)=8mm, Termination Method=Solder, Type=MicroUSB
J2 J3: library part CMP-2000-06636-2, "CONN HEADER VERT 6POS 2.54MM", Current Rating=3A, Manufacturer=Harwin, Temperature="-40°C to +105°C", Temperature Range High=+105°C, Temperature Range Low=-40°C, Automotive=No, Category=Conn, ComponentLink2Description=Datasheet, ComponentLink2URL=https://cdn.harwin.com/pdfs/M20-998.pdf, Conn Gender=Male, Conn Orientation=Vertical, Contact Material=Tin,Nickel, Device Class L1=Connectors, Device Class L2="Headers and Wire Housings", Device Class L3=unset, Digikey Description="CONN HEADER VERT 6POS 2.54MM", Height=8.99mm, Lead Free=Yes, Manufacturer Part Number=M20-9980346, Mouser Description="2.54mm (0.1\") Pitch DIL Vertical PC Tail Pin Header, 6.1mm mating pin height, tin, 3+3 contacts", Number of Contacts=6, Number Of Rows=2, Octopart=https://octopart.com/m20-9980346-harwin-5436545, Package=M20-9980346, Pitch=2.54mm, RoHS=TRUE
J4: library part CMP-1502-00010-1, "Male Box Header WR-BHD, THT, Vertical, pitch 2.54 mm, 20 pins", Contact Resistance=20mOhm, Manufacturer="Wurth Elektronik", Operating Temperature=-40to125degC, Withstanding Voltage=500VAC, Working Voltage=250VAC, Datasheet URL=https://katalog.we-online.de/em/datasheet/6120xx21621.pdf, Gender=Male, Manufacturer URL=http://www.we-online.de, Mounting Technology=THT, Orientation=Vertical, Package Reference=61202021621, Packaging=Tray, Part Number=61202021621, Pin Number=20, Pitch=2.54mm, Published Date=August2018, Publisher=WurthElektronik
PTH1 PTH2 PTH3: "MB Standoffs"
R1: library part CMP-2000-00564-2, "Chip Resistor, 560 Ohm, +/- 1%, 0.1 W, -55 to 155 degC, 0603 (1608 Metric), RoHS, Tape and Reel", Case\Package=QFN, Max Operating Temperature="85 degC", Max Supply Voltage="5 V", Min Operating Temperature="-20 degC", Min Supply Voltage="3 V", Output Current="2 A", Output Voltage="35 V", Package Quantity=1500, ComponentLink1Description="Manufacturer URL", ComponentLink1URL=http://www.panasonic.com/, ComponentLink2Description=Datasheet, ComponentLink2URL=http://industrial.panasonic.com/cdbs/www-data/pdf/RDA0000/AOA0000C86.pdf, DatasheetVersion=Apr-15, Mount="Surface Mount", Outputs=1, PackageDescription="2-Pin Surface Mount Device, Body 1.6 x 0.85 mm", PackageReference=0603, Packaging="Tape and Reel", Pins=28, Radiation Hardening=No, REACH SVHC="No SVHC", RoHSCompliant=true
R2 R3: library part CMP-2000-00608-1, Manufacturer=Panasonic, Part Number=ERJ-3EKF6650V
R4 R6: library part CMP-02407-000418-1, "RES SMD 100 OHM 1% 1/8W 0603", Case Code (Imperial)=0603, Case Code (Metric)=1608, Max Operating Temperature=125°C, Max Power Dissipation=125mW, Min Operating Temperature=-55°C, Package Quantity=1, Power Rating=100mW, Resistance=10kR, Temperature Coefficient=50ppm/°C, Tolerance=1%, Voltage Rating=75V, Case/Package=0603, Composition="Thin Film", Contact Plating=Tin, Depth=0.85mm, Height=0.022inch, Lead Free="Lead Free", Length=1.55mm, Military Standard=Not, Mount="Surface Mount", Number of Terminations=2, Packaging="Tape and Reel", Radiation Hardening=No, Voltage Rating (DC)=75V, Width=0.8mm
R5: library part CMP-26527-000122-1, "RES 0 OHM JUMPER 1/4W 0603", Case Code (Imperial)=0603, Case Code (Metric)=1608, Max Operating Temperature=155°C, Min Operating Temperature=-55°C, Package Quantity=5000, Resistance=0mR, Case/Package=0603, Height=0.021inch, Length=0.061inch, Mount="Surface Mount", Number of Terminations=2, Packaging="Tape and Reel", Radiation Hardening=No, RoHS Compliant=Yes, Termination=Wraparound, Width=0.031inch
R7 R8 R9: library part CMP-2100-03662-2, "RES SMD 100K OHM 1% 1/10W 0603", Case Code (Imperial)=0603, Case Code (Metric)=1608, Max Operating Temperature=155°C, Max Power Dissipation=100mW, Min Operating Temperature=-55°C, Resistance=100kR, Resistance Tolerance=1%, Resistor Type="Thick Film", Temperature Coefficient=100ppm/°C, Voltage Rating=50V, Working Voltage=75V, Case/Package=0603, Construction=Rectangular, Depth=0.8mm, Features="Moisture Resistant", Height=0.45mm, Lead Free="Lead Free", Length=1.6mm, Military Standard=Not, Number of Pins=2, Number of Terminations=2, Packaging="Tape and Reel", Power Rating=100mW, REACH SVHC="No SVHC", RoHS Compliant=Yes, Series=RC, Technology="THICK FILM", Termination=SMD/SMT, Tolerance=1%, Voltage Rating (DC)=50V, Width=0.8mm
SW1 SW2: library part CMP-2000-05160-2, "SWITCH TACTILE SPST-NO 0.05A 12V", Case/Package=SMD/SMT, Color=Black, Contact Resistance=100mR, Current Rating=50mA, Max Operating Temperature=60°C, Max Voltage Rating (DC)=12V, Min Operating Temperature=-20°C, Operating Force=160gf, Package Quantity=1, Actuator Length=0.85mm, Actuator Material=Nylon, Actuator Type=Standard, Contact Material=Silver, Contact Plating=Silver, Depth=9mm, Illumination Type=Non-Illuminated, Lead Free="Lead Free", Length=6mm, Max Current Rating=50mA, Mechanical Life=100000Cycles, Mount="Surface Mount", Orientation=Straight, Packaging="Tape and Reel", REACH SVHC="No SVHC", Switch Function=Off-Mom, Termination="Gull Wing", Throw Configuration=SPST, Voltage Rating (DC)=12V
U1: library part CMP-0243-00227-1, "ARM Cortex-M4 32-bit MCU+FPU, 512 KB Flash, 128 KB Internal RAM, 114 I/Os, 144-Pin LQFP, -40 to 105 degC, Tray", I/Os (High Current)=114, Operating Frequency(F) (Processor speed) (MHz)=180, Package Description=LQFP144, Package Reference="144-Pin Low Profile Quad Flat Package, Body 20 x 20 mm, Pitch 0.5 mm", Supply Voltage(Vcc) min (V)=1.7, ComponentLink1Description="Manufacturer URL", ComponentLink1URL=http://www.st.com/, ComponentLink2Description=Datasheet, ComponentLink2URL=http://www.st.com/st-web-ui/static/active/en/resource/technical/document/datasheet/DM00141306.pdf, Core="ARM Cortex-M4", D/A Converter=2, DatasheetVersion="Rev. 6", FLASH Size (Prog) (kB)=512, Internal RAM Size (kB)=128, Mounting Technology="Surface Mount", Packing=Tray
U2: library part CMP-0136-00450-1, "300mA CMOS LDO, 3-Pin SOT-223, Extended Temperature, Tape and Reel", DatasheetVersion="revB, 2002", PackageDescription="3-Lead Plastic Small Outline Transistor (DB) [SOT-223]", PackageReference=SOT-223-DB3, PackageVersion="revBB, Aug-2009"
U3: library part CMP-1063-00178-1, "2-Channel Low-Capacitance ESD Protection Array, 6-Pin SOT-23, Pb-Free, Tape and Reel", Manufacturer="On Semiconductor", ComponentLink1Description="Manufacturer URL", ComponentLink1URL=http://www.onsemi.com/, ComponentLink2Description=Datasheet, ComponentLink2URL=http://www.onsemi.com/pub_link/Collateral/CM1231%20DATA%20SHEET.PDF, ComponentLink3Description="Package Specification", ComponentLink3URL=http://www.onsemi.com/pub_link/Collateral/527AJ.PDF, DatasheetVersion="Rev. 3", Direction=Bidirectional, Mounting Technology="Surface Mount", Number of Lines=2, PackageDescription="6-Pin Small Outline Transistor, Body 2.85 x 1.55 mm, Pitch 0.95 mm", PackageReference=SOT23-6-527AJ, PackageVersion="Rev. B, 02/2012", Packing="Tape and Reel", PartNumber=CM1231-02SO, PPK Max (W)=0.225, RoHS=Pb-Free
U4 U6: library part INM4P441, "Microphone Module"
U5: "GPS Module"
U7: "LoRa Module"
Y1: library part CMP-27762-010926-1, "XTAL Oscillator 12.288MHz ±50ppm HCMOS, TTL 3.3V 4-SMD 5mm x 3.2mm", Case/Package=SMD/SMT, Frequency=12.288MHz, Frequency Stability=50ppm, Load Capacitance=15pF, Max Operating Temperature=70°C, Max Supply Current=15mA, Max Supply Voltage=3.63V, Min Operating Temperature=-20°C, Min Supply Voltage=2.97V, Operating Frequency="12.288 MHz", Operating Supply Voltage=3.3V, Depth=3.2mm, Height=0.051inch, Lead Free="Lead Free", Length=5mm, Mount="Surface Mount", Number of Pins=4, Packaging="Tape and Reel", Radiation Hardening=No, Series=ASFL1, Termination=SMD/SMT, Width=0.126inch
Y2: "8 MHz Oscillator"

## Via types
v1: diameter 50, hole 28, Top Layer to Bottom Layer, tented both sides, 80 vias
v2: diameter 50/50/50/50 (per signal layer), hole 28, Top Layer to Bottom Layer, tented both sides, 1 vias

## Nets (pads, with @x,y where several pads share a name; then routed paths per layer and width w, separated by ;. In a path a pad name is that pad's centre, name@x,y a point inside that pad or via, vN(x,y) a via of type N, cw(c..) or ccw(c..) an arc to the next point about the centre after c; other vN are vias at no path point)
5V: C23.2 C25.2 C26.1 C27.2 C33.1 C34.2 FB1.2 U2.1 U3.5 U7.1 U7.3 | length 3722.5
  Top Layer w4: U2.1@1565,376.69 U2.1 ; C23.2@1938.95,486.38 C23.2 C23.2@1950.33,475
  Top Layer w10: U7.1 841.46,2005 C33.1 768.54,2006.46 740,2035 v1(740,2115) 740,2175 768.54,2203.54 C34.2 841.46,2205 U7.3 ; U2.1@1565,376.69 v1(1565,455) ; U2.1 C27.2@1706.77,376.14 ; C27.2 C25.2 ; C27.2@1710.93,373.84 FB1.2 ; C25.2@1714.92,486.38 C26.1 C23.2@1938.95,486.38 ; C23.2@1950.33,475 U3.5
  Mid Layer 1 w10: v1(740,2115) 685,2060 685,1605 1563,727 1563,457 v1(1565,455)
BUTTON: SW2.1 U1.7 | length 516.8
  Top Layer w10: U1.7 2051.38,2171.38 2166.5,2286.5 SW2.1
D_IN_N: J1.2 U3.6 | length 315.5
  Top Layer w8.69: U3.6 2068.98,437.6 2074.06,432.51 2074.06,315.74 2074.06,196.23 2071.64,193.81 2071.64,166.53 J1.2@2068.11,163
D_IN_P: J1.3 U3.1 | length 315.5
  Top Layer w8.69: J1.3@2093.7,163 2090.17,166.53 2090.17,193.81 2087.75,196.23 2087.75,310.07 2087.75,432.51 2092.84,437.6 U3.1
D_N: U1.103 U3.4 | length 774.9
  Top Layer w8.69: U3.4 2068.98,512.4 2074.06,517.49 2074.06,850.43 2074.06,1202.15 2071.66,1204.56 2071.66,1247.08 U1.103
D_P: U1.104 U3.3 | length 774.9
  Top Layer w8.69: U1.104 2090.15,1247.08 2090.15,1204.56 2087.75,1202.15 2087.75,856.1 2087.75,517.49 2092.84,512.4 U3.3
GND: C1.2 C2.2 C3.1 C4.2 C6.1 C7.1 C8.2 C9.1 C10.2 C11.2 C12.1 C13.1 C14.1 C15.1 C16.1 C17.1 C18.1 C19.1 C20.1 C21.1 C22.1 C23.1 C24.2 C25.1 C26.2 C27.1 C28.2 C29.1 C30.2 C31.1 C32.2 C33.2 C34.1 J1.5 J1.6 J1.7 J1.8 J1.9 J1.10 J1.11 J2.5 J3.2 J4.4 J4.6 J4.8 J4.10 J4.12 J4.14 J4.16 J4.18 J4.20 PTH1.1 PTH2.1 PTH3.1 R3.2 R5.2 R8.2 R9.2 SW1.4 SW2.3 U1.16 U1.31 U1.38 U1.51 U1.61 U1.83 U1.94 U1.107 U1.120 U1.130 U2.2 U2.4 U3.2 U4.4 U5.2 U5.6 U6.4 U7.2 Y1.2 Y2.2 Y2.4 | length 131
  Top Layer w10: J4.20@225.73,868.88 J4.20 ; C19.1@1245,2006.46 C19.1 ; C28.2 1296.46,2208.97 C29.1 C29.1@1295,2306.46 ; C9.1 C9.1@1527.51,2228.97
  other v1: 2307,57 1475,60 1710,95 1883,106 2307,149 2195,475 1605,520 1835,595 2030,790 1695,1010 2195,1010 1880,1030 3125,1160 1295,1165 1895,1365 1245,1445 2645,1550 2515,1555 1145,1590 1505,1710 2515,1745 1135,1770 75,1830 1512.75,1892.25 2580,1955 2430,2095 1245,2125 1765,2295 1975,2305 1605,2320 2165,2810 3440,2970
GPIO_EXTI0: U1.46 U7.11 | length 1435.6
  Top Layer w10: U7.11 510,2105 782.68,1832.32 U1.46
GPIO_EXTI1: U1.47 U7.10 | length 1402.4
  Top Layer w10: U7.10 570,2005 762.36,1812.64 U1.47
GPIO_EXTI8: U1.77 U7.4 | length 1643.1
  Top Layer w10: v1(1385,1115) 1385,1125 1447,1187 1545.55,1187 1558.91,1200.36 1558.91,1247.33 U1.77
  Bottom Layer w10: U7.4 1005,2225 1005,1515 1376.96,1143.04 1376.96,1123.04 v1(1385,1115)
I2S_CK: U1.99 Y1.3 | length 290.3
  Top Layer w4: Y1.3 Y1.3@1992.32,960.63
  Top Layer w10: Y1.3@1992.32,960.63 U1.99
L/R_1: R8.1 U1.15 U6.1 | length 2249.5
  Top Layer w10: v1(1890,1960) 1892.79,1962.79 1892.79,2081.21 U1.15 ; R8.1 3305,2966.54 U6.1
  Bottom Layer w10: v1(1890,1960) 1899.5,1960 1946.49,1913.01 2658.01,1913.01 3185,2440 3185,2625 3285,2725 U6.1
L/R_2: R7.1 U1.90 U4.1 | length 2228.4
  Top Layer w10: U4.1 R7.1@705,225 ; R7.1 R7.1@705,225 ; v1(1685,745) 1605,745 1485,625 1106.54,625 719.72,238.18 717.75,238.18 705,225.43 R7.1@705,225 ; v1(1815,1365) 1815.16,1364.84 U1.90
  Bottom Layer w10: v1(1685,745) 1815,875 v1(1815,1365)
LED_R: R2.2 U1.14 | length 1347.6
  Top Layer w10: U1.14 1913.58,2016.42 v1(1975,1955) ; R2.2 v1(2285,2905)
  Bottom Layer w10: v1(1975,1955) 2220,2200 2220,2840 v1(2285,2905)
LED_Y: R1.2 U1.13 | length 1455.3
  Top Layer w10: U1.13 1933.27,2036.73 1965,2005 1995,2005 v1(2045,1955) ; v1(2365,2905) R1.2
  Bottom Layer w10: v1(2045,1955) 2249,2159 2249,2789 v1(2365,2905)
NetC1_1: C1.1 U1.23 Y2.1 | length 343.5
  Top Layer w4: C1.1@1785,2186.38 C1.1@1787.95,2186.38
  Top Layer w10: U1.23 1736.42,2140.75 C1.1@1782.05,2186.38 ; C1.1@1787.95,2186.38 1830,2228.43 1830,2280 1870,2320 Y2.1
NetC2_1: C2.1 U1.24 Y2.3 | length 430.2
  Top Layer w4: C2.1 C2.1@1724.17,2456.61
  Top Layer w10: U1.24@1716.73,2112.32 1716.73,2449.17 C2.1 ; C2.1@1724.17,2456.61 Y2.3
NetC5_1: C5.1 SW1.3 | length 203.6
  Top Layer w10: SW1.3 480.08,1675 C5.1
NetC6_2: C6.2 U1.106 | length 136.3
  Top Layer w10: U1.106 2130.12,1132.44 C6.2
NetC7_2: C7.2 U1.71 | length 115
  Top Layer w10: C7.2 1334.8,1340.2 U1.71
NetC24_1: C24.1 FB1.1 J1.1 | length 385.5
  Top Layer w10: C24.1 FB1.1 2013.84,336.16 2042.52,307.48 J1.1@2042.52,163
NetD1_2: D1.2 R1.1 | length 108
  Top Layer w10: R1.1 D1.2
NetD2_2: D2.2 R2.1 | length 136.5
  Top Layer w10: D2.2 R2.1
NetD3_2: D3.2 R3.1 | length 146.9
  Top Layer w10: R3.1 D3.2
NetR4_1: R4.1 U1.143 | length 264.7
  Top Layer w4: R4.1@2500.2,1989.8 R4.1
  Top Layer w10: U1.143 R4.1@2500.2,1989.8
NetR5_1: R5.1 U1.138 | length 106.8
  Top Layer w10: U1.138 2343.98,1891.38 R5.1
NRST: C5.2 J4.15 R6.1 SW1.1 U1.25 | length 2672.6
  Top Layer w10: R6.1 v1(615,1825) ; J4.15 431.5,974.65 SW1.1 636.42,1546.42 705,1615 705,1735 v1(615,1825) ; C5.2 v1(615,1825) ; v1(1697,1959) U1.25
  Mid Layer 2 w10: v1(615,1825) 1563,1825 v1(1697,1959)
RESET: J2.3 SW1.2 | length 251.4
  Top Layer w10: SW1.2 118.5,1531.5 215,1435 J2.3
RST_LoRa: U1.78 U7.9 | length 2321.6
  Top Layer w10: v1(1455,1115) 1455,1126.91 1493.09,1165 1543.35,1165 1578.94,1200.59 U1.78
  Bottom Layer w10: U7.9 985,2705 985,1345 1265,1065 1405,1065 v1(1455,1115)
SAI1_FS: U1.21 U4.2 U6.2 | length 4818.7
  Top Layer w10: v1(1775,1855) 1775.44,1855.44 1775.44,2081.98 U1.21
  Mid Layer 2 w10: U4.2 398,392 398,477 476,555 1201,555 1525,879 1525,1187 1775,1437 v1(1775,1855)
  Bottom Layer w10: v1(1775,1855) 2051.5,1855 2066.5,1870 2760,1870 3385,2495 3385,2545 U6.2
SAI1_SCK: U1.20 U4.3 U6.3 | length 4362.4
  Top Layer w10: U1.20 1795.47,1964.53 v1(1865,1895)
  Mid Layer 2 w10: U4.3 564,524 1239,524 1561,846 1561,1180 1865,1484 v1(1865,1895)
  Bottom Layer w10: v1(1865,1895) 2675,1895 U6.3
SAI1_SD: R9.1 U1.2 U4.6 U6.6 | length 5172.7
  Top Layer w4: R9.1@2437.46,2238 R9.1
  Top Layer w10: U1.2 2149.8,2140.8 2247,2238 v1(2342,2238) R9.1@2437.46,2238
  Mid Layer 2 w10: U4.6 165,1009 215,1059 1101.07,1059 1682,1639.93 1682,1868 1886,2072 2176,2072 v1(2342,2238) 3318,2238 U6.6
SPI1_MISO: U1.42 U7.6 | length 1597.7
  Top Layer w10: U7.6 850,2505 690,2345 690,1995 815,1870 1155.2,1870 1196.26,1911.06 U1.42
SPI1_MOSI: U1.43 U7.7 | length 1732.2
  Top Layer w10: U7.7 890,2605 655,2370 655,1995 800,1850 1155,1850 1196.38,1891.38 U1.43
SPI1_NSS: U1.40 U7.8 | length 1001.3
  Top Layer w10: U7.8 1190,2600 1190,1975 1214.57,1950.43 U1.40
SPI1_SCK: U1.41 U7.5 | length 727.1
  Top Layer w10: U7.5 1155,2335 1155,1980 1204.25,1930.75 U1.41
SWCLK: J4.9 U1.109 | length 2735.1
  Top Layer w10: U1.109 2479.49,1320.51 v1(2485,1315)
  Bottom Layer w10: J4.9 785.12,917.26 785.12,854.33 984.45,655 2325,655 2485,815 v1(2485,1315)
SWDIO: J4.7 U1.105 | length 2719.2
  Top Layer w10: U1.105@2111.54,1248.79 2111.54,1381.54 v1(2115,1385)
  Bottom Layer w10: J4.7 877.38,925 1435,925 1685,675 2305,675 2405,775 2405,1285 2305,1385 v1(2115,1385)
SWO: J4.13 U1.133 | length 3608.2
  Top Layer w10: U1.133 2302.95,1792.95 2355,1845 2505,1845 2565,1785 v1(2565,1411)
  Bottom Layer w10: J4.13 585.12,917.26 585.12,854.33 804.45,635 2355,635 2565,845 v1(2565,1411)
TIM1_CH1: J2.2 U1.60 | length 1321.3
  Top Layer w10: v1(905,1555) 990,1640 1315,1640 1335,1620 1335,1575 1353.27,1556.73 U1.60
  Bottom Layer w10: J2.2 585,1235 v1(905,1555)
TIM2_CH3: U1.36 U5.5 | length 2991.8
  Top Layer w10: U1.36 1480.51,2029.49 1846,1664 v1(1923,1664) ; v1(3385,855) U5.5
  Mid Layer 2 w10: v1(1923,1664) 1958,1629 1958,1077 2246,789 3319,789 v1(3385,855)
USART1_RX: J3.4 U1.102 | length 1268.9
  Top Layer w10: U1.102 2051.38,1371.38 2135,1455 v1(2135,1515)
  Bottom Layer w10: v1(2135,1515) 2265,1515 2305,1475 2845,1475 J3.4
USART1_TX: J3.3 U1.101 | length 1705.7
  Top Layer w10: U1.101 2031.69,1391.69 2065,1425 2065,1505 v1(2055,1515)
  Bottom Layer w10: v1(2055,1515) 2120,1450 3130,1450 3215,1535 3215,1625 3195,1645 J3.3
USART2_RX: U1.37 U5.4 | length 2752.3
  Top Layer w10: U1.37 1465.51,2009.49 2009.22,1465.78 2009.22,1440.78 v1(2015,1435) ; v1@3275,845 v1(3285,855) U5.4
  Mid Layer 2 w10: v1(2015,1435) 2015,1097 2257,855 v1(3285,855)
USART2_TX: U1.119 U5.3 | length 1269.6
  Top Layer w10: U1.119 2312.64,1517.36 2465,1365 3055,1365 3185,1235 U5.3
USART3_RX: J3.6 U1.45 | length 1651.6
  Top Layer w10: U1.45 1467.99,1852.01 1535,1785 v1(1590,1785)
  Bottom Layer w10: v1(1590,1785) 2974.77,1785 3014.77,1745 J3.6
USART3_TX: J3.5 U1.69 | length 2131.8
  Top Layer w10: U1.69 1510.43,1379.57 v1(1515,1375)
  Bottom Layer w10: v1(1515,1375) 1515,1655 1585,1725 2265,1725 2385,1605 2865,1605 2955,1695 3075,1695 3115,1735 J3.5
VDD: C3.2 C4.1 C8.1 C9.2 C10.1 C11.1 C12.2 C13.2 C14.2 C15.2 C16.2 C17.2 C18.2 C19.2 C20.2 C21.2 C22.2 C28.1 C29.2 C30.1 C31.2 C32.1 D1.1 D2.1 D3.1 J2.1 J3.1 J4.1 J4.2 R4.2 R6.2 R7.2 U1.6 U1.17 U1.30 U1.32 U1.33 U1.39 U1.52 U1.62 U1.72 U1.84 U1.95 U1.108 U1.121 U1.131 U1.144 U2.3 U4.5 U5.1 U6.5 Y1.1 Y1.4 | length 5305.3
  Top Layer w4: C32.1@313.54,325 C32.1 ; v1(1240,1335) v1@1248.8,1326.2 ; C15.2@1280,1701.46 C15.2@1292.76,1714.21 ; C15.2@1284.33,1710.79 C15.2@1285,1711.46 ; C16.2@1293.03,1300 C16.2 C16.2@1296.97,1300 ; C19.2@1303.54,2003.03 C19.2 C19.2@1305,2006.46 ; C21.2@1641.46,2205 C21.2 C21.2@1653.03,2191.46 ; C13.2 C13.2@1697.05,1142.05 ; C11.1@1838.62,1140 C11.1 ; C3.2@1890,770 C3.2 ; C18.2@2228.03,1142.09 C18.2 ; C22.2@2353.03,2036.46 C22.2 ; C12.2@2373.27,1556.73 C12.2 ; C30.1 C30.1@3461.46,2625
  Top Layer w10: U4.5 C32.1@313.54,325 ; v1(285,1825) R6.2 ; v1(705,75) R7.2 ; J4.1 J4.1@1130,973.15 ; v1(1135,1710) 1271.46,1710 C15.2@1280,1701.46 ; v1(1145,1520) C14.2@1277.36,1520 ; v1@1248.8,1326.2 1266.83,1326.2 C16.2@1293.03,1300 ; v1(1270,495) C4.1@1377.49,495 ; C14.2@1280,1517.36 U1.62 ; C15.2@1292.76,1714.21 U1.52 ; C16.2@1296.97,1300 1317.48,1320.51 U1.72 ; C19.2@1303.54,2003.03 1336.46,1970.12 U1.39 ; C19.2@1305,2006.46 v1(1305,2080) ; C29.2 1355,2306.46 v2(1355,2380) ; C28.1 1407.51,2155 1525,2155 1539.57,2140.43 U1.33 ; C28.1@1357.51,2217.51 C29.2@1357.51,2301.03 ; U2.3@1382.49,378.1 C4.1 ; v1(1455,2385) 1456.46,2383.54 C9.2 1456.46,2193.54 1475,2175 1545,2175 1559.25,2160.75 U1.32 ; v1(1585,2205) C21.2@1641.46,2205 ; U1.30 1598.62,2137.05 C21.2@1653.03,2191.46 ; C13.2 v1(1770,1140) C11.1@1838.62,1140 ; C13.2@1697.05,1142.05 U1.84 ; v1(1810,2905) D2.1 ; v1(1813.54,765) C3.2@1885,765 ; C11.1 C10.1 ; U1.17 1854.53,2169.41 C20.2@1878.03,2192.91 ; C20.2@1880.12,2195 v1(1975,2195) ; C3.2@1890,770 Y1.1 Y1.4 ; C10.1@1913.58,1147.2 U1.95 ; U1.6 2071.41,2082.67 2071.41,2126.41 v1(2155,2210) ; U1.108 2169.49,1200.63 C18.2@2228.03,1142.09 ; C18.2 v1(2320,1142.09) ; U1.121 C12.2@2373.27,1556.73 ; U1.131 C17.2@2370.04,1753.58 ; U1.144 2326.06,2009.49 C22.2@2353.03,2036.46 ; C22.2 2503.1,2036.46 2505,2038.36 v1(2505,2115) ; C12.2 2380,1560 2380,1746.46 C17.2@2375,1751.46 ; D1.1 v1(2900,2905) ; U5.1 v1(2985,1245) ; C30.1@3461.46,2625 U6.5 ; D3.1 v1(3605,2090)
  other v1: 2380,1673
pads on no net: J1.4 J2.4 J2.6 J4.3 J4.5 J4.11 J4.17 J4.19 SW2.2 SW2.4 U1.1 U1.3 U1.4 U1.5 U1.8 U1.9 U1.10 U1.11 U1.12 U1.18 U1.19 U1.22 U1.26 U1.27 U1.28 U1.29 U1.34 U1.35 U1.44 U1.48 U1.49 U1.50 U1.53 U1.54 U1.55 U1.56 U1.57 U1.58 U1.59 U1.63 U1.64 U1.65 U1.66 U1.67 U1.68 U1.70 U1.73 U1.74 U1.75 U1.76 U1.79 U1.80 U1.81 U1.82 U1.85 U1.86 U1.87 U1.88 U1.89 U1.91 U1.92 U1.93 U1.96 U1.97 U1.98 U1.100 U1.110 U1.111 U1.112 U1.113 U1.114 U1.115 U1.116 U1.117 U1.118 U1.122 U1.123 U1.124 U1.125 U1.126 U1.127 U1.128 U1.129 U1.132 U1.134 U1.135 U1.136 U1.137 U1.139 U1.140 U1.141 U1.142 U7.12 U7.13 U7.14

## Polygon pours and split planes (outlines as drawn)
GND on Top Layer "GND_L01_P012" (solid, pour order 12): 0,0 3750,0 3750,3030 0,3030
VDD on Mid Layer 2 "VDD_L03_P010" (solid, pour order 10): 0,0 3750,0 3750,3030 0,3030
GND on Bottom Layer "GND_L04_P013" (solid, pour order 13): 0,0 3750,0 3750,3030 0,3030
GND on Mid Layer 1 "GND_L02_P009" (solid, pour order 9): 0,0 3750,0 3750,3030 0,3030

## Silkscreen, mask and mechanical layers (free items; w line width, h text height)
Top Overlay:
  text "Rafael Luna-Cruz / Venkat Krishnan / Aidan Murphy / Kevin Yuen / Matt Hahn" at 2470,2526 h30
  text "Acoustic Detection Array" at 2319,2391 h30
  text "USART" at 3060,1840 h30
  text "RESET" at 115,1780 h30
  text "TX3" at 3195,1735 h30
  text "RX3" at 2860,1730 h30
  text "TX1" at 3195,1630 h30
  text "RX1" at 2860,1625 h30
  text "GND" at 2850,1530 h30
  text "VDD" at 3195,1525 h30
  text "GND" at 45,1410 h30
  text "RESET" at 165,1410 h30
  text "VDD" at 335,1410 h30
  text "TIM1_CH1" at 395,1185 h30
  text "SWD" at 791.56,1021.14 h30
  text "SWO" at 490,1020 h30
  text "SWC" at 680,1020 h30
Mechanical 1:
  the board outline again, w10

## Text inside footprints (layer, text, board x,y; h text height)
J4: Top Overlay "19" at 135,955 h30; Top Overlay "20" at 130,860 h30; Top Overlay "1" at 1190,965 h30; Top Overlay "2" at 1190,860 h30